# Altium PCB CountDown LCD-Relay-Sound - Display Board.PcbDoc
Units mm, origin at the board's own origin, x right, y up, seen from the top; angles counter-clockwise.
Board outline 64 x 71 mm, 2 copper layers (Top Layer, Bottom Layer); 8 components, 35 nets, 50 pads, 0 vias.
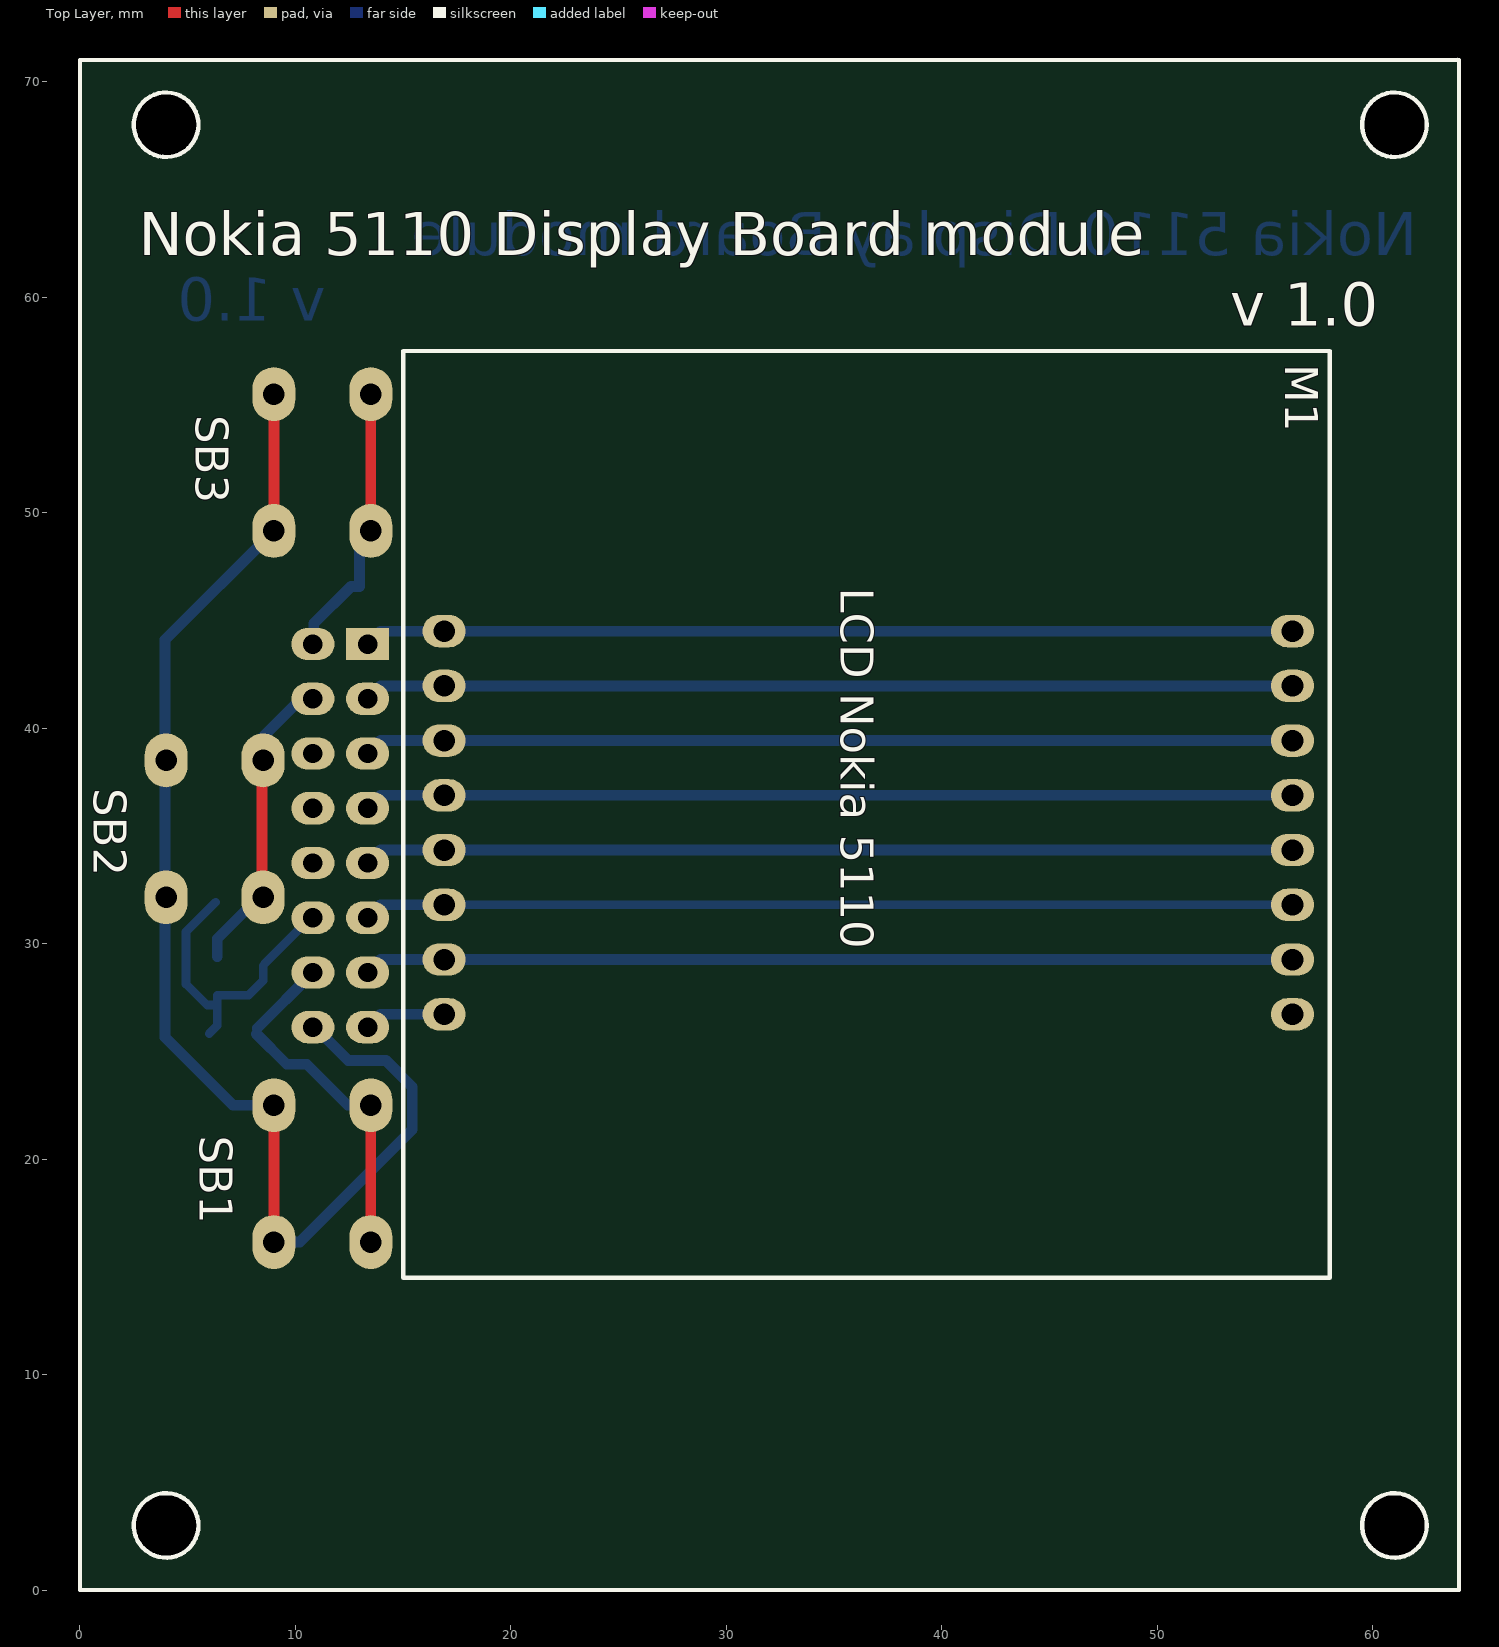
[diagram p0: Top Layer view]
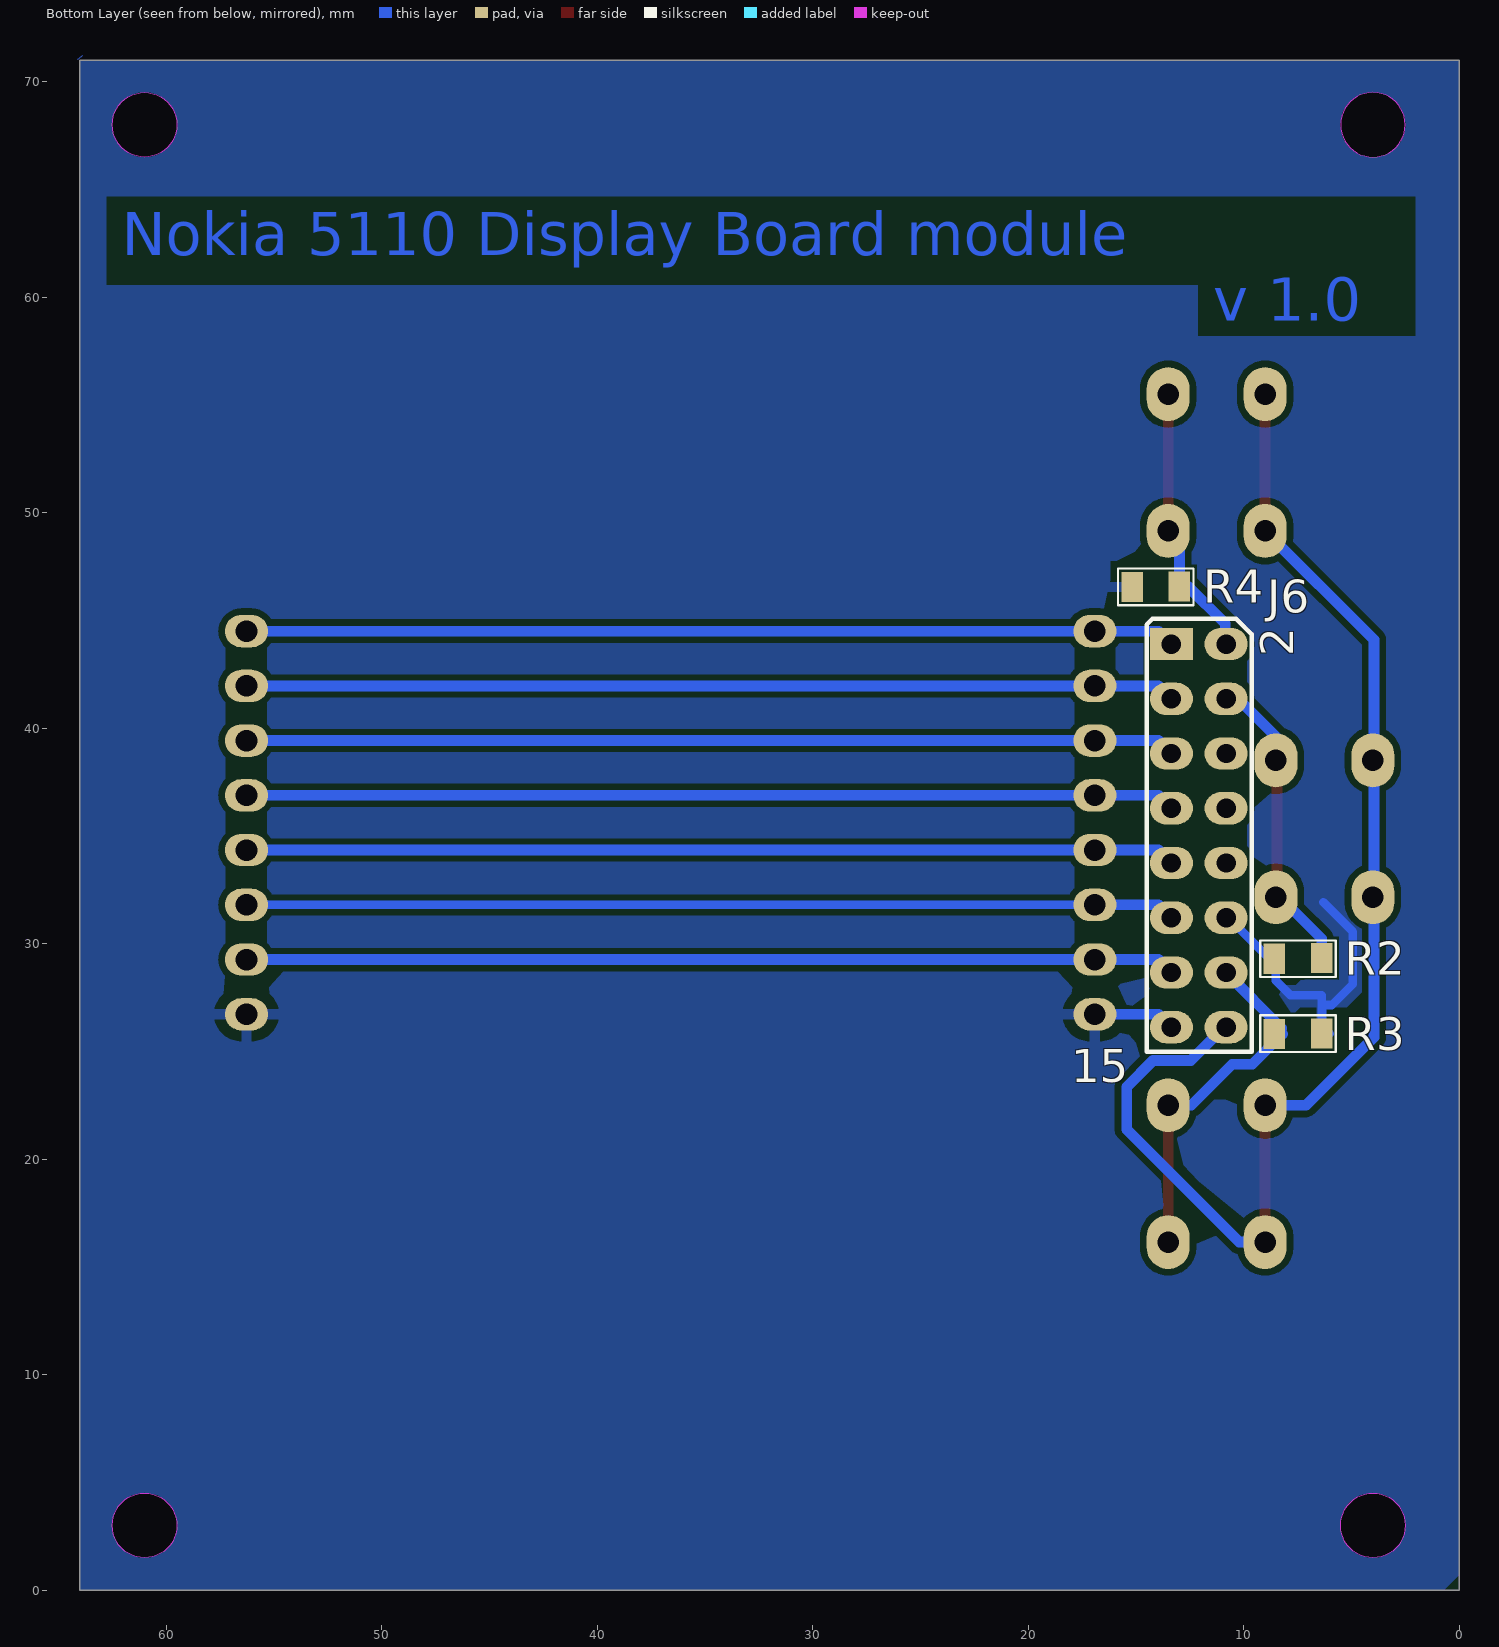
[diagram p1: Bottom Layer view, seen from below]
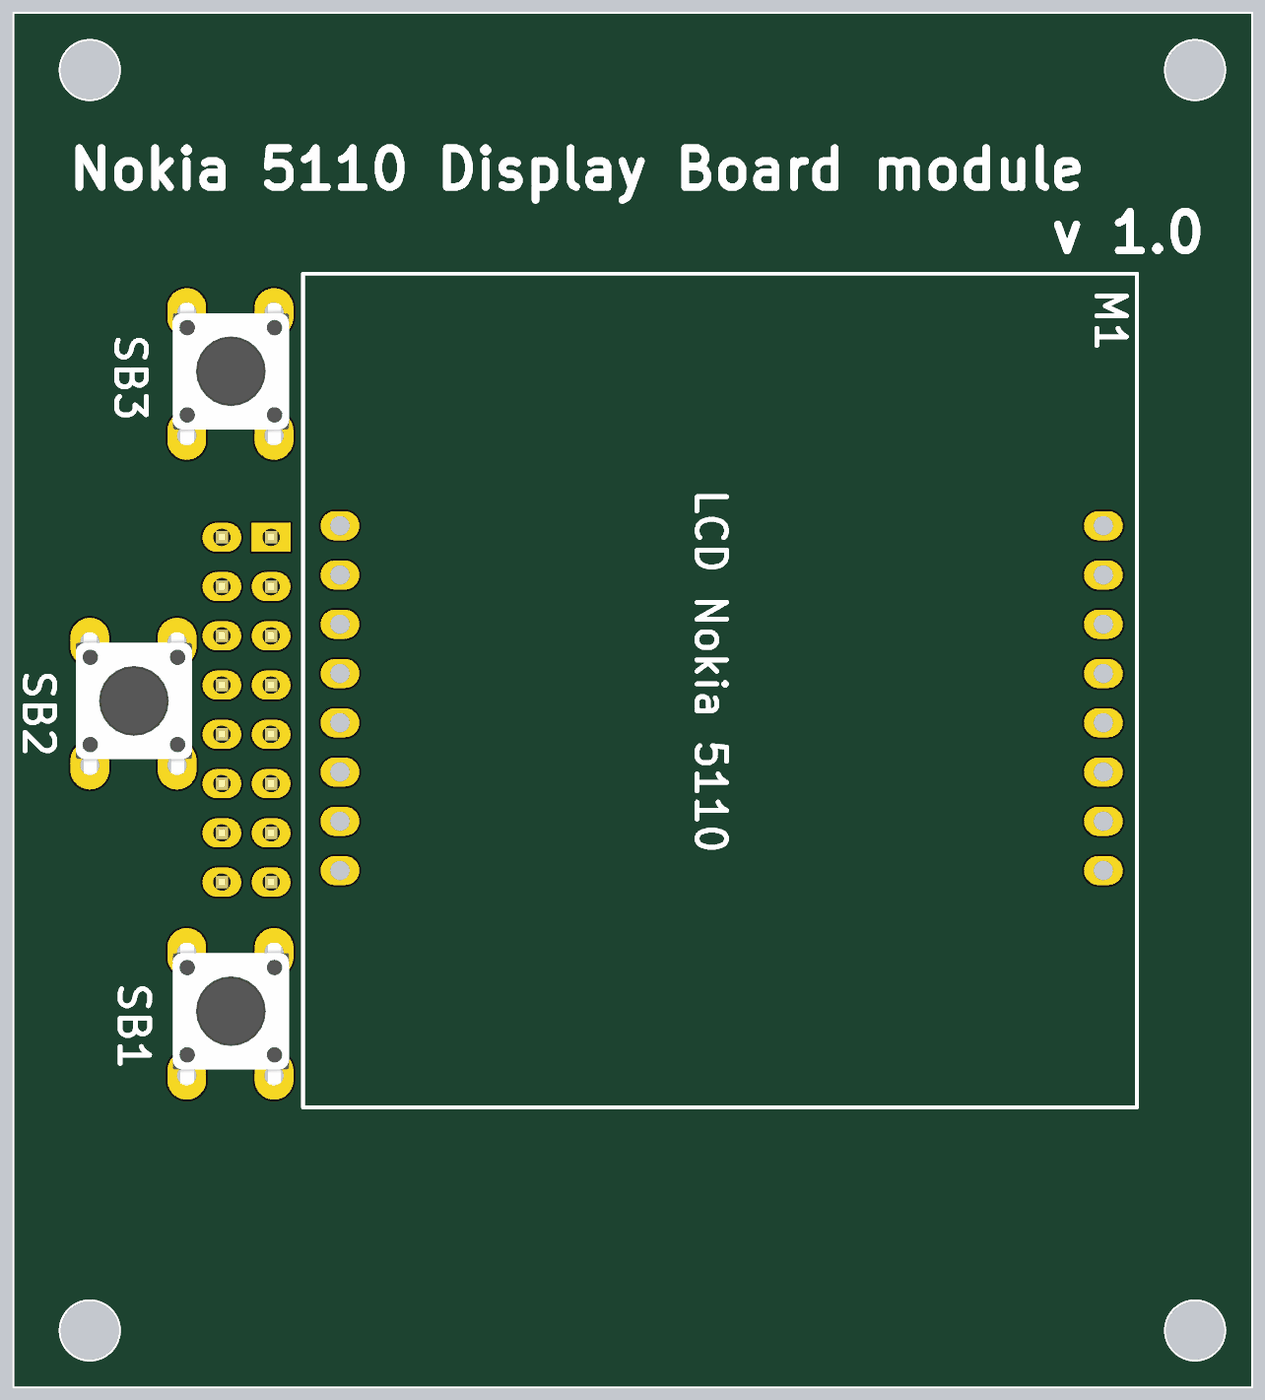
[diagram p2: 3D render of the assembled board from above, using the file's embedded part models]
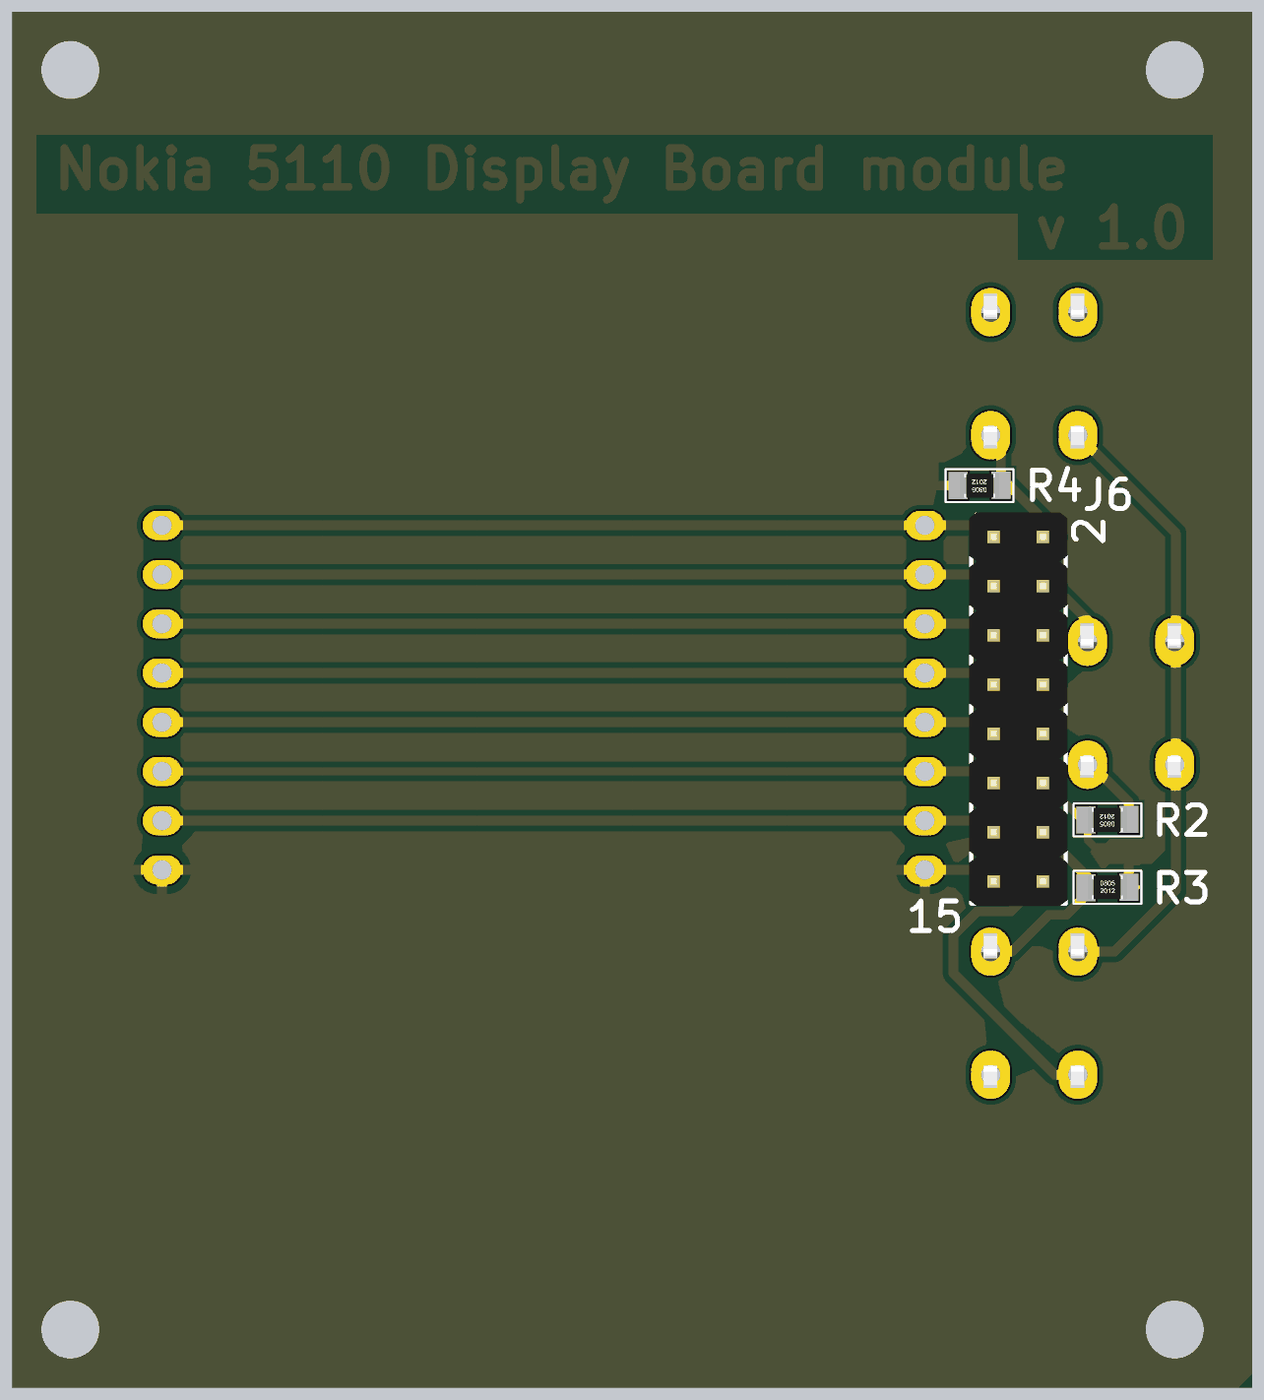
[diagram p3: 3D render of the assembled board from below, using the file's embedded part models]

## Layer stack, top to bottom
Top Solder: solder mask 0.0102, Solder Resist, Dk 3.5
Top Layer: signal copper 0.0356
Dielectric 1: dielectric 0.32, FR-4, Dk 4.8
Bottom Layer: signal copper 0.0356
Bottom Solder: solder mask 0.0102, Solder Resist, Dk 3.5

## Board outline
0,0 64,0 64,71 0,71
cut-out: 59.5,68 ccw(c61,68) 61,66.5 ccw(c61,68) 62.5,68 ccw(c61,68) 61,69.5 ccw(c61,68)
cut-out: 4,66.5 cw(c4,68) 2.5,68 cw(c4,68) 4,69.5 cw(c4,68) 5.5,68 cw(c4,68)
cut-out: 59.5,3 ccw(c61,3) 61,1.5 ccw(c61,3) 62.5,3 ccw(c61,3) 61,4.5 ccw(c61,3)
cut-out: 2.5,3 ccw(c4,3) 4,1.5 ccw(c4,3) 5.5,3 ccw(c4,3) 4,4.5 ccw(c4,3)

## Design rules (kind name [scope] priority, off if disabled: settings)
Clearance [All] p1: gap=0.3
ComponentClearance [All] p1: gap=0.01 collisioncheckmode=3 verticalgap=0.2 showdistances=FALSE
Height [All] p1: minheight=0 maxheight=25 prefheight=12.7
HoleSize [All] p1: absolutevalues=TRUE maxlimit=3.2 minlimit=0.4 maxpercent=80.000 minpercent=20.000
HoleToHoleClearance [All] p1: gap=0.2 allowstackedmicrovias=TRUE
PlaneClearance [All] p1: clearance=0.5
PlaneConnect [All] p1: planeconnectstyle=Relief reliefexpansion=0.508 reliefentries=4 reliefconductorwidth=0.5 reliefairgap=0.5
PolygonConnect [All] p1: connectstyle=Relief reliefconductorwidth=0.5 reliefentries=4 polygonreliefangle="90 Angle" airgapwidth=0.5
RoutingVias [All] p1: holewidth=0.7 width=1.5 viastyle="Through Hole" minholewidth=0.4 minwidth=0.4 maxholewidth=3.2 maxwidth=7
SilkToSilkClearance [All] p1: silktosilkclearance=0.05
SilkToSolderMaskClearance [IsPad] p1: minsilkscreentomaskgap=0.2 clearancetoexposedcopper=TRUE
SolderMaskExpansion [All] p1: expansion=0.1
Width [All] p1: maxlimit=3 minlimit=0.2 preferedwidth=0.5
21 further rules are at their usual default settings.

## Components (designator, comment, footprint, x,y, rotation, side; value= is the part's Value field where it differs from the comment)
J6 "Connector" "LINE 2.54 x 16D (2 x 8)" 13.35,43.9 r180 bottom
M1 "LCD Nokia 5110" "LCD Nokia 5110" 35.5,36 r270 top
R2 "10kOm" "SMD 0805 (2012)" 8.5,25.8 r180 bottom
R3 "10kOm" "SMD 0805 (2012)" 6.45,29.325 r0 bottom
R4 "10kOm" "SMD 0805 (2012)" 13.05,46.575 r0 bottom
SB1 "Start" "Switch Button 4P" 9,22.5 r0 top
SB2 "Menu" "Switch Button 4P" 4,38.5 r0 top
SB3 "OFF" "Switch Button 4P" 9,55.5 r0 top

## Footprints (in the part's own frame and the unit in brackets; to place one, negate y for a bottom-side part, rotate by r counter-clockwise, add the part's x,y. Pads: shape width x height; smd on the part's side, far side on the other; paste and mask are expansions set on the pad)
"LCD Nokia 5110" [mm]
  oval 1.5x2 hole 1: CE(-5.96,20.77) CE(-5.96,-18.6) CLK(1.66,20.77) CLK(1.66,-18.6) DC(-3.42,20.77) DC(-3.42,-18.6) DIN(-0.88,20.77) DIN(-0.88,-18.6) GND(9.28,20.77) GND(9.28,-18.6) LIGHT(6.74,20.77) LIGHT(6.74,-18.6) RST(-8.5,20.77) RST(-8.5,-18.6) VCC(4.2,20.77) VCC(4.2,-18.6)
  silkscreen extent -21.5,-20.5 21.5,22.5, body extent -21.5,-20.5 21.5,22.5, height 5.1
"LINE 2.54 x 16D (2 x 8)" [mm]
  rect 2x1.5 hole 0.9: 1(0,0)
  oval 2x1.5 hole 0.9: 2(2.54,0) 3(0,-2.54) 4(2.54,-2.54) 5(0,-5.08) 6(2.54,-5.08) 7(0,-7.62) 8(2.54,-7.62) 9(0,-10.16) 10(2.54,-10.16) 11(0,-12.7) 12(2.54,-12.7) 13(0,-15.24) 14(2.54,-15.24) 15(0,-17.78) 16(2.54,-17.78)
  silkscreen extent -1.15,-18.92 3.72,1.17, body extent -1.27,-19.04 3.81,1.28, height 2.3
"SMD 0805 (2012)" [mm]
  rect 1x1.4 smd: 1(-0.075,0) 2(2.125,0.025)
  silkscreen extent -0.72,-0.82 2.78,0.87, body extent 0.03,-0.6 2.03,0.65, height 0.45
"Switch Button 4P" [mm]
  oval 2x2.5 hole 1: 1(0,-6.35) 1(0,0) 2(4.5,-6.35) 2(4.5,0)
  body extent -0.73,-7.02 5.28,0.95, height 4.9

## Part data
J6: library part "PLD-16 (2 x 8)", "Vert, Dbl line, Male"
R2 R3 R4: library part "Res All Types"
SB1 SB2 SB3: library part Button, "Tact button"

## Nets (pads, with @x,y where several pads share a name; then routed paths per layer and width w, separated by ;. In a path a pad name is that pad's centre, name@x,y a point inside that pad or via, vN(x,y) a via of type N, cw(c..) or ccw(c..) an arc to the next point about the centre after c; other vN are vias at no path point)
+3.3V: J6.11 M1.VCC | length 43.2
  Bottom Layer w0.4: M1.VCC@16.9,31.8 M1.VCC@56.27,31.8
  Bottom Layer w0.5: J6.11 13.95,31.8 M1.VCC@16.9,31.8
+5V: J6.16 SB1.1 SB2.1 SB3.1 | length 61
  Top Layer w0.5: SB1.1@9,16.15 SB1.1@9,22.5 ; SB3.1@9,49.15 SB3.1@9,55.5
  Bottom Layer w0.5: SB1.1@9,16.15 10.2,16.15 15.425,21.375 15.425,23.35 14.2,24.575 12.45,24.575 10.905,26.12 J6.16 ; SB1.1@9,22.5 7.1,22.5 3.95,25.65 3.95,44.1 SB3.1@9,49.15
+12V: 
+24V: 
"BT 1": 
"BT 2": 
"BT 3": 
"BTX 1": J6.14 R2.1 SB1.2 | length 16.7
  Top Layer w0.5: SB1.2@13.5,16.15 SB1.2@13.5,22.5
  Bottom Layer w0.5: R2.1@8.2,25.8 9.6,24.4 10.525,24.4 12.425,22.5 SB1.2@13.5,22.5 ; R2.1@8.225,26.075 J6.14
"BTX 2": J6.4 R3.1 SB2.2 | length 14.4
  Top Layer w0.5: SB2.2@8.45,31.85 SB2.2@8.45,38.2
  Bottom Layer w0.5: R3.1@6.375,29.4 6.375,30.225 8,31.85 SB2.2@8.45,31.85 ; SB2.2@8.45,38.2 8.45,39.55 10.26,41.36 J6.4
"BTX 3": J6.2 R4.1 SB3.2 | length 12.9
  Top Layer w0.5: SB3.2@13.5,49.15 SB3.2@13.5,55.5
  Bottom Layer w0.5: J6.2 10.85,43.94 10.85,44.85 12.575,46.575 R4.1 12.975,48.625 SB3.2@13.5,49.15
BUZZER: 
GND: J6.12 J6.15 M1.GND R2.2 R3.2 R4.2 | length 18.2
  Bottom Layer w0.4: R2.2@6,25.825 6.375,26.2 6.375,27.15 ; 6.3,31.925 4.925,30.55 4.925,28.125 5.9,27.15 6.375,27.15 ; R3.2@8.5,28.975 8.5,28.275 7.825,27.6 6.375,27.6 6.375,27.15 ; R3.2@8.55,29.05 10.7,31.2 J6.12
  Bottom Layer w0.5: J6.15 13.95,26.72 M1.GND@16.9,26.72
"LCD CE": 
"LCD CLK": 
"LCD DC": 
"LCD DIN": 
"LCD RESET": 
"LED STRIP": 
"LED STRIP OUT": 
NetD1_A: 
NetJ5_14: 
NetJ6_1: J6.1 M1.RST | length 43.2
  Bottom Layer w0.5: J6.1 13.95,44.5 16.9,44.5 M1.RST@56.27,44.5
NetJ6_3: J6.3 M1.CE | length 43.2
  Bottom Layer w0.5: J6.3 13.95,41.96 16.9,41.96 M1.CE@56.27,41.96
NetJ6_5: J6.5 M1.DC | length 43.2
  Bottom Layer w0.5: J6.5 13.95,39.42 16.9,39.42 M1.DC@56.27,39.42
NetJ6_7: J6.7 M1.DIN | length 43.2
  Bottom Layer w0.5: J6.7 13.95,36.88 16.9,36.88 M1.DIN@56.27,36.88
NetJ6_9: J6.9 M1.CLK | length 43.2
  Bottom Layer w0.5: J6.9 13.95,34.34 16.9,34.34 M1.CLK@56.27,34.34
NetJ6_13: J6.13 M1.LIGHT | length 43.2
  Bottom Layer w0.5: J6.13 13.95,29.26 16.9,29.26 M1.LIGHT@56.27,29.26
NetQ1_1: 
NetQ2_1: 
RELAY: 
"RELAY IN": 
"RELAY OFF": 
"RELAY ON": 
RESET: 
SCK: 
pads on no net: J6.6 J6.8 J6.10

## Polygon pours and split planes (outlines as drawn)
GND on Bottom Layer "Top Layer-No Net" (solid, pour order 5): 63.9,71.209 64.07,71.038 64.093,71.038
GND on Bottom Layer "Top Layer-No Net" (solid, pour order 4): 64,0 64,71 0,71 0,0

## Other copper
Top Layer:
  text ".Layer_Name" at 42.125,74.1 h1
Bottom Layer:
  text ".Layer_Name" at 42.125,74.1 h1
  text "Nokia 5110 Display Board module" at 62.05,61.95 h2
  text "v 1.0" at 11.4,58.9 h2

## Silkscreen, mask and mechanical layers (free items; w line width, h text height)
Top Overlay:
  circle w0.2: c61,68 r1.5
  circle w0.2: c4,68 r1.5
  circle w0.2: c4,3 r1.5
  circle w0.2: c61,3 r1.5
  lines w0.001: 63.9,71.1 64,71
  lines w0.2: 0,0 0,71 64,71 64,0 0,0
  text ".Layer_Name" at 42.125,74.1 h1
  text "Nokia 5110 Display Board module" at 2.725,61.95 h2
  text "v 1.0" at 53.375,58.675 h2
Bottom Overlay:
  text ".Layer_Name" at 42.125,74.1 h1
Top Solder:
  text ".Layer_Name" at 42.125,74.1 h1
Bottom Solder:
  text ".Layer_Name" at 42.125,74.1 h1
Mechanical 1:
  text "64 x 71 mm (LCD for CountDown mainboard)" at 0.5,74.175 h1
  text ".Pcb_File_Name_No_Path" at 0.3,72.1 h1

## Text inside footprints (layer, text, board x,y; h text height)
J6: Bottom Overlay "2" at 7.7,43.325 h1.52 r270; Bottom Overlay "15" at 18,23.575 h1.52